# EAGLE board Revision A (EAGLE 6.4)
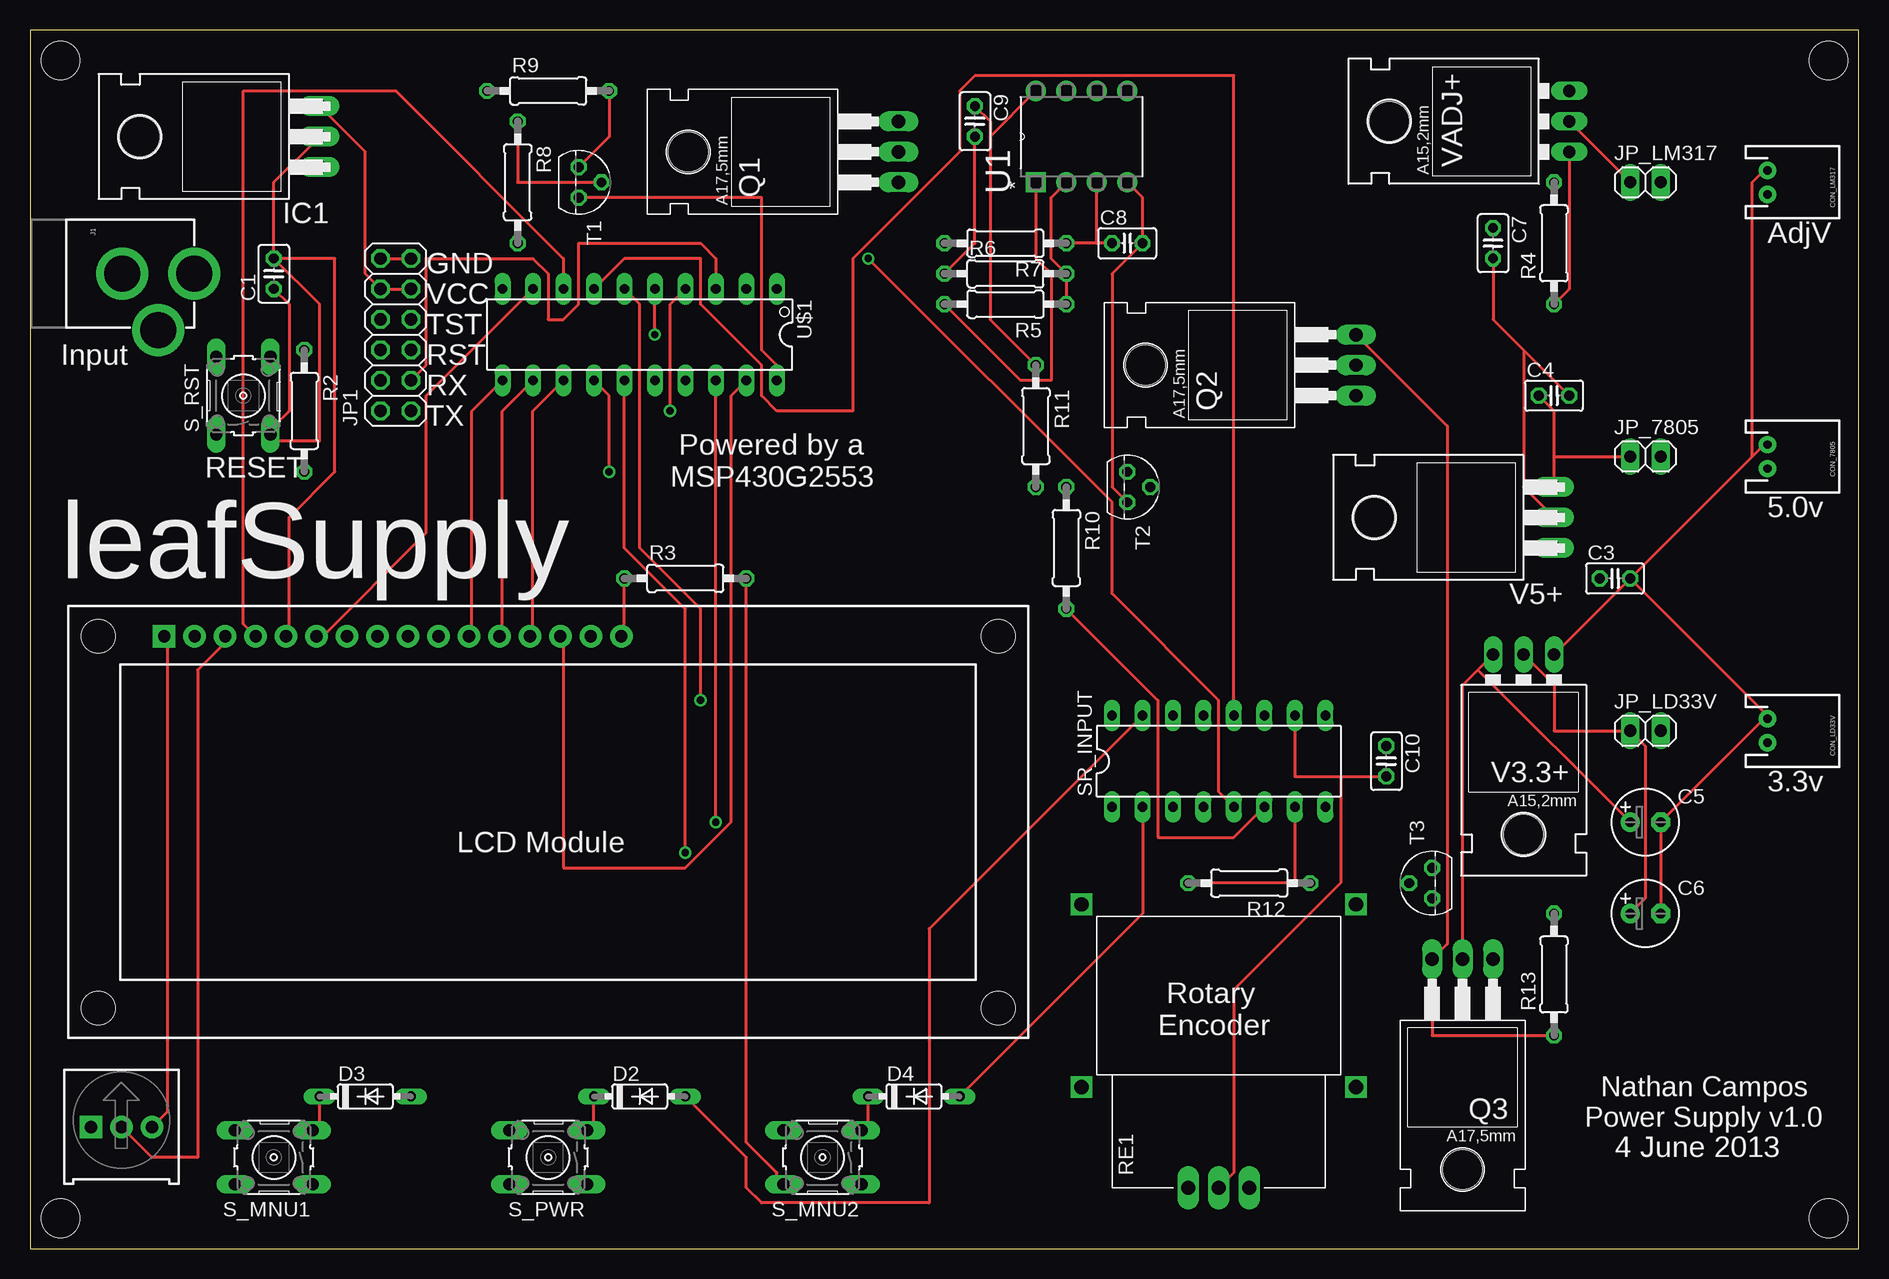
[diagram p0: board, top side]
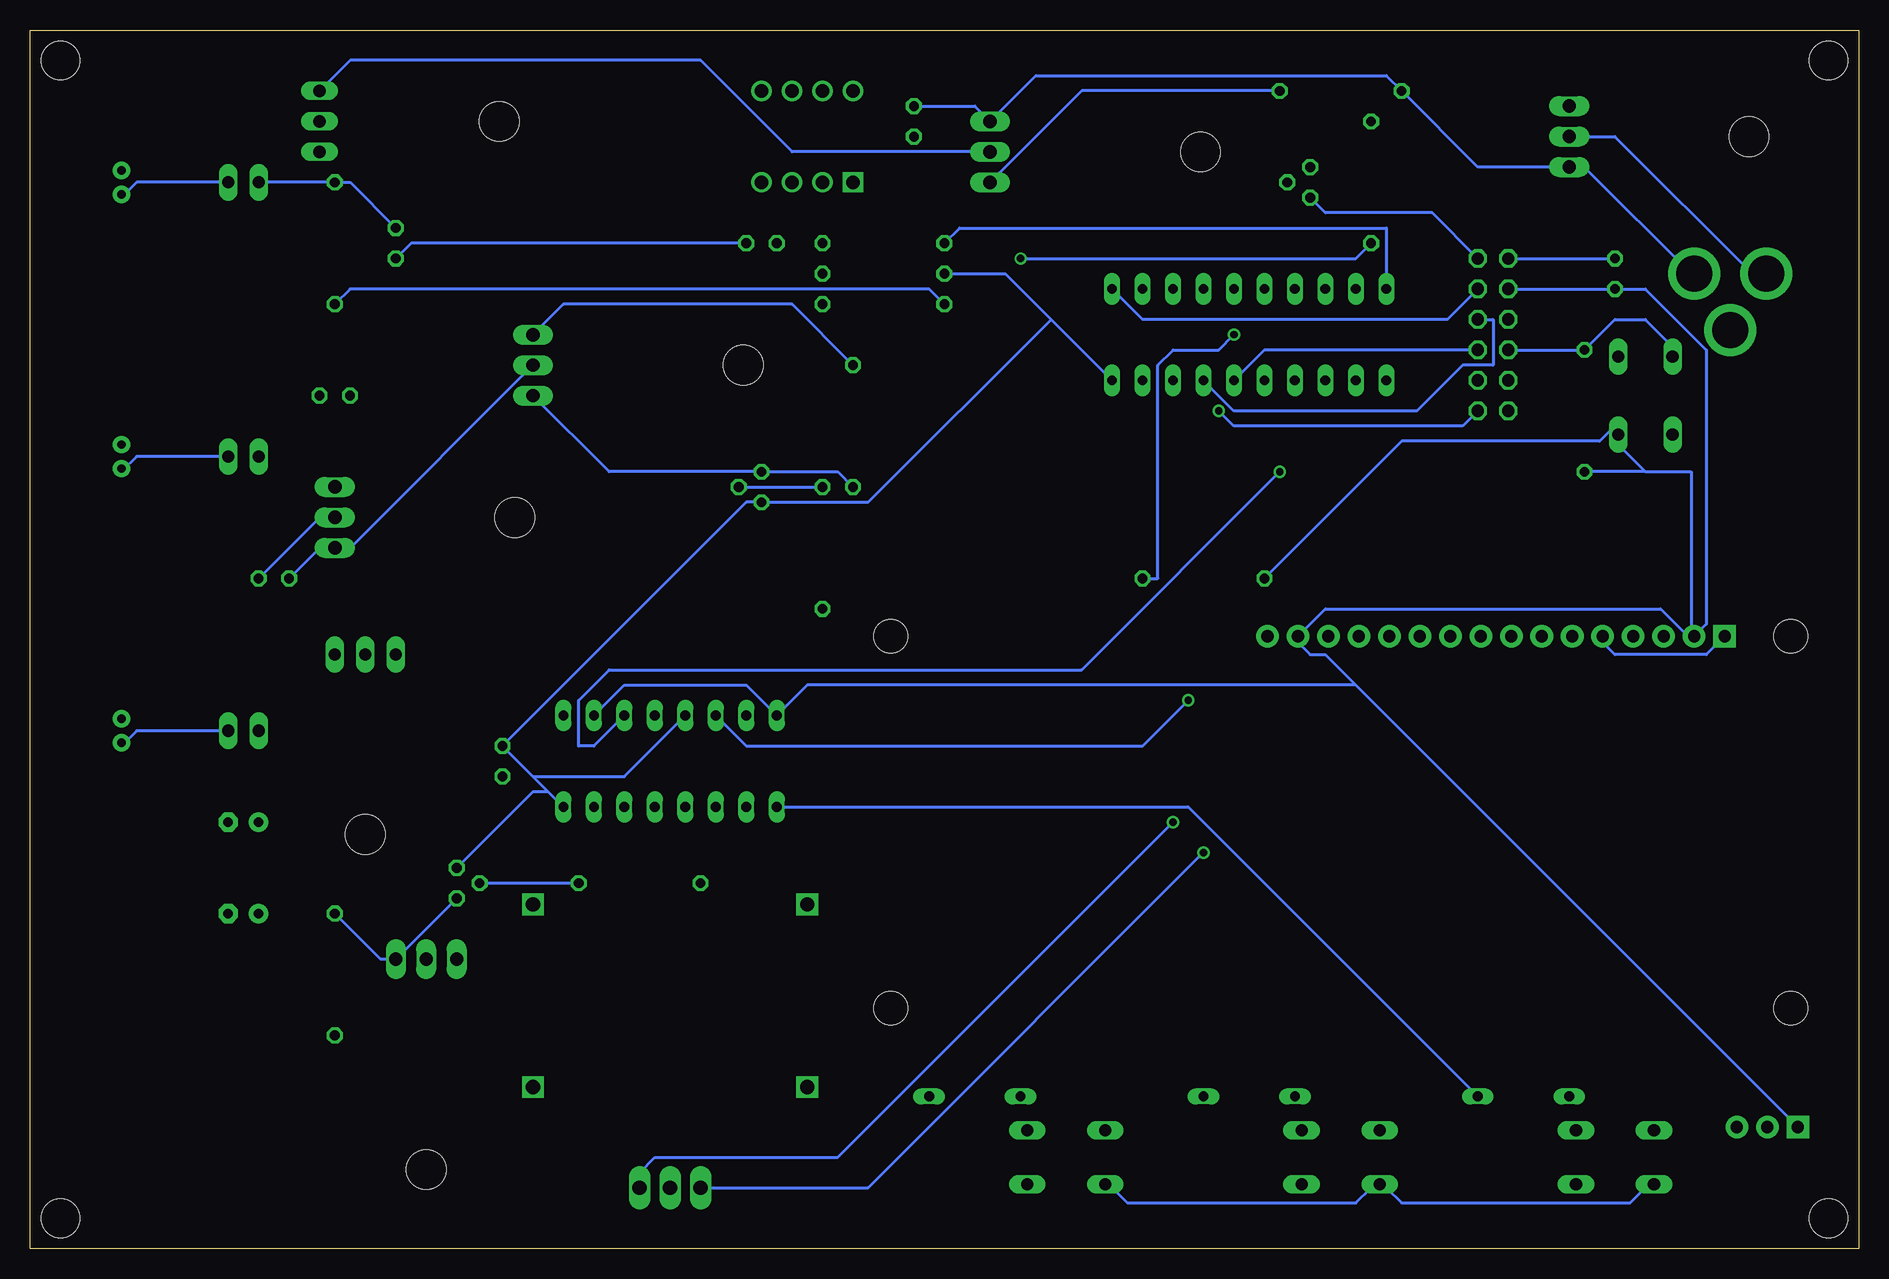
[diagram p1: board, bottom side, seen from below]

Size 152.4 x 101.6 mm. Coordinates in mm from the lower left corner, seen from the top.
Outline: 0,0 152.4,0 152.4,101.6 0,101.6 0,0
Copper layers (1*16): Top 0.035mm / dielectric 1.5mm / Bottom 0.035mm
Design rules "default": minimum track width 10mil, minimum drill 24mil, track to track 8mil, track to pad 8mil, pad to pad 8mil, via to via 8mil, smd to smd 8mil, copper to edge 40mil, drill to drill 8mil, minimum pad ring 10mil, minimum via ring 8mil, stop-mask expansion 4mil, vias tented up to drill 0mil, thermal gap 10mil
Holes 3.2 mm at 2.54,99.06 149.86,99.06 149.86,2.54 2.54,2.54

## Footprints (pad centres in the part's own frame; a part is rotated, then mirrored left to right if it is on the bottom)
C025-025X050 = drill 0.813 octagon: 1 -1.27,0; 2 1.27,0
E2,5-6 = drill 0.813 pad 1.6: + -1.27,0 | drill 0.813 pad 1.6 octagon: - 1.27,0
JST-2-PTH = drill 0.7 pad 1.448: 1 -1,0; 2 1,0
DO35-7 = drill 0.813 long: A 3.81,0; C -3.81,0
TO220H = drill 1.118 long: 1 -2.54,-10.16; 2 0,-10.16; 3 2.54,-10.16 | hole 3.302: 0,4.826
POWER_JACK_PTH = drill 2.997 pad 4.318: GND 0,7.7; GNDBREAK 4.7,10.7; PWR 0,13.7
2X06 = drill 1.016 octagon: 1 -6.35,-1.27; 2 -6.35,1.27; 3 -3.81,-1.27; 4 -3.81,1.27; 5 -1.27,-1.27; 6 -1.27,1.27; 7 1.27,-1.27; 8 1.27,1.27; 9 3.81,-1.27; 10 3.81,1.27; 11 6.35,-1.27; 12 6.35,1.27
1X02 = drill 1.016 long: 1 -1.27,0; 2 1.27,0
TO220 = drill 1.118 long: 1 -2.54,-6.35; 2 0,-6.35; 3 2.54,-6.35 | hole 3.302: 0,11.176
3386U = drill 1.016 pad 1.88 square: 1 -2.54,-0.015 | drill 1.016 pad 1.88: 2 0,-0.015; 3 2.54,-0.015
0207/10 = drill 0.813 octagon: 1 -5.08,0; 2 5.08,0
ECW1J-B = drill 1.2 square: P$4 -11.43,18.542; P$5 11.43,18.542; P$6 -11.43,3.302; P$7 11.43,3.302 | drill 1.2 long: PA -2.54,-5.08; PB 2.54,-5.08; PC 0,-5.08
B3F-10XX = drill 1.016 long: 1 -3.251,2.261; 2 3.251,2.261; 3 -3.251,-2.261; 4 3.251,-2.261
DIL16 = drill 0.813 long: 1 -8.89,-3.81; 2 -6.35,-3.81; 3 -3.81,-3.81; 4 -1.27,-3.81; 5 1.27,-3.81; 6 3.81,-3.81; 7 6.35,-3.81; 8 8.89,-3.81; 9 8.89,3.81; 10 6.35,3.81; 11 3.81,3.81; 12 1.27,3.81; 13 -1.27,3.81; 14 -3.81,3.81; 15 -6.35,3.81; 16 -8.89,3.81
TO92 = drill 0.813 octagon: 1 1.27,0; 2 0,1.905; 3 -1.27,0
DIP254P762X508-8 = drill 1.118 square: 1 -7.62,7.62 | drill 1.118: 2 -7.62,5.08; 3 -7.62,2.54; 4 -7.62,0; 5 0,0; 6 0,2.54; 7 0,5.08; 8 0,7.62
LCD-16X2 = drill 1.016 pad 1.88 square: 1 -32,15.5 | drill 1.016 pad 1.88: 2 -29.46,15.5; 3 -26.92,15.5; 4 -24.38,15.5; 5 -21.84,15.5; 6 -19.3,15.5; 7 -16.76,15.5; 8 -14.22,15.5; 9 -11.68,15.5; 10 -9.14,15.5; 11 -6.6,15.5; 12 -4.06,15.5; 13 -1.52,15.5; 14 1.02,15.5; 15 3.56,15.5; 16 6.1,15.5 | hole 2.8: -37.5,15.5; -37.5,-15.5; 37.5,15.5; 37.5,-15.5
N20 = drill 0.813 long: 1 -11.435,-3.81; 2 -8.895,-3.81; 3 -6.355,-3.81; 4 -3.815,-3.81; 5 -1.275,-3.81; 6 1.265,-3.81; 7 3.805,-3.81; 8 6.345,-3.81; 9 8.885,-3.81; 10 11.425,-3.81; 11 11.425,3.81; 12 8.885,3.81; 13 6.345,3.81; 14 3.805,3.81; 15 1.265,3.81; 16 -1.275,3.81; 17 -3.815,3.81; 18 -6.355,3.81; 19 -8.895,3.81; 20 -11.435,3.81
TO220L1 = drill 1.016 long: 1 -2.54,-3.81; 2 0,-3.81; 3 2.54,-3.81 | hole 3.302: 0,11.176
317TL = drill 1.016 long: 1 -2.54,-3.81; 2 0,-3.81; 3 2.54,-3.81 | hole 3.302: 0,11.176

## Placement (x,y rotation side)
C1  0.1uF  [C025-025X050]  20.32,81.28 90 top
C3  0.47uF  [C025-025X050]  132.08,55.88 0 top
C4  0.1uF  [C025-025X050]  127,71.12 0 top
C5  10uF  [E2,5-6]  134.62,35.56 0 top
C6  10uF  [E2,5-6]  134.62,27.94 0 top
C7  0.1uF  [C025-025X050]  121.92,83.82 270 top
C8  0.1uF  [C025-025X050]  91.44,83.82 0 top
C9  0.1uF  [C025-025X050]  78.74,93.98 270 top
C10  0.1uF  [C025-025X050]  113.03,40.64 270 top
CON_7805  M02JST-PTH-2  [JST-2-PTH]  144.78,66.04 270 top
CON_LD33V  M02JST-PTH-2  [JST-2-PTH]  144.78,43.18 270 top
CON_LM317  M02JST-PTH-2  [JST-2-PTH]  144.78,88.9 270 top
D2  1N4148DO35-7  [DO35-7]  50.8,12.7 0 top
D3  1N4148DO35-7  [DO35-7]  27.94,12.7 0 top
D4  1N4148DO35-7  [DO35-7]  73.66,12.7 0 top
IC1  7805T  [TO220H]  13.97,92.71 90 top
J1  POWER_JACKPTH  [POWER_JACK_PTH]  0,81.28 270 top
JP1  [2X06]  30.48,76.2 90 top
JP_7805  [1X02]  134.62,66.04 0 top
JP_LD33V  [1X02]  134.62,43.18 0 top
JP_LM317  [1X02]  134.62,88.9 0 top
Q1  IRF9530  [TO220]  66.04,91.44 90 top
Q2  IRF9530  [TO220]  104.14,73.66 90 top
Q3  IRF9530  [TO220]  119.38,17.78 180 top
R1  TRIMPOT-PTH-KNOB  [3386U]  7.62,10.16 0 top
R2  10kΩ  [0207/10]  22.86,69.85 270 top
R3  10kΩ  [0207/10]  54.61,55.88 0 top
R4  240Ω  [0207/10]  127,83.82 90 top
R5  100kΩ  [0207/10]  81.28,78.74 180 top
R6  100kΩ  [0207/10]  81.28,81.28 0 top
R7  100kΩ  [0207/10]  81.28,83.82 180 top
R8  10kΩ  [0207/10]  40.64,88.9 270 top
R9  10kΩ  [0207/10]  43.18,96.52 0 top
R10  10kΩ  [0207/10]  86.36,58.42 270 top
R11  10kΩ  [0207/10]  83.82,68.58 270 top
R12  10kΩ  [0207/10]  101.6,30.48 180 top
R13  10kΩ  [0207/10]  127,22.86 90 top
RE1  ECW1J-B24-BCCO24LECW1J-B  [ECW1J-B]  99.06,10.16 0 top
S_MNU1  [B3F-10XX]  20.32,7.62 180 top
S_MNU2  [B3F-10XX]  66.04,7.62 180 top
S_PWR  [B3F-10XX]  43.18,7.62 180 top
S_RST  [B3F-10XX]  17.78,71.12 90 top
SR_INPUT  74HC595N  [DIL16]  99.06,40.64 0 top
T1  BC547  [TO92]  45.72,88.9 270 top
T2  BC547  [TO92]  91.44,63.5 270 top
T3  BC547  [TO92]  116.84,30.48 90 top
U1  TLV2372IP  [DIP254P762X508-8]  91.44,96.52 90 top
U2  LCD-16X2SILK  [LCD-16X2]  43.18,35.56 0 top
U$1  G2XX3---N20  [N20]  50.8,76.2 180 top
V3.3+  LD117AV33  [TO220L1]  124.46,45.72 180 top
V5+  7805T  [TO220H]  116.84,60.96 90 top
VADJ+  [317TL]  124.46,93.98 90 top

## Library data of the parts
C1 C3-C10 = rcl
CON_7805 CON_LD33V CON_LM317 J1 = SparkFun-Connectors
D2-D4 = diode
IC1 V5+ = linear
JP1 JP_7805 JP_LD33V JP_LM317 = pinhead
Q1-Q3 = transistor-fet
R1 = SparkFun-Electromechanical
R2-R13 = resistor
RE1 = Custom Stuff
S_MNU1 S_MNU2 S_PWR S_RST = switch-omron; MPN: B3F-1000; OC_FARNELL: 176432; OC_NEWARK: 36M3542
SR_INPUT = 74xx-eu
T1-T3 = transistor
U1 = Texas Instruments_By_element14_Batch_1; MPN: TLV2372IP; OC_FARNELL: 8455031; OC_NEWARK: 76C7976; PACKAGE: PDIP; SUPPLIER: Texas Instruments
U2 = SparkFun-Displays
U$1 = TI_MSP430_v16
V3.3+ VADJ+ = v-reg

## Nets
7805_IN: C3.1 Q2.2 V5+.1
7805_OUT: C4.1 JP_7805.1 V5+.3
+5V: C1.1 C10.2 IC1.3 JP1.9 JP1.10 R1.1 R2.2 RE1.PC SR_INPUT.10 SR_INPUT.16 U2.2 U2.15 U$1.1
CLOCK: SR_INPUT.11 U$1.14
D4: U2.11 U$1.11
D5: U2.12 U$1.12
D6: U2.13 U$1.13
D7: U2.14 U$1.19
DATA: SR_INPUT.14 U$1.6
ENABLE: U2.6 U$1.9
GND: C1.2 C3.2 C4.2 C5.- C6.- C7.2 C8.2 C9.2 C10.1 CON_7805.1 CON_LD33V.1 CON_LM317.1 IC1.2 J1.GND JP1.11 JP1.12 R1.3 R3.1 R6.1 S_RST.3 SR_INPUT.8 SR_INPUT.13 T1.1 T2.1 T3.1 U1.4 U2.1 U2.5 U2.16 U$1.20 V3.3+.1 V5+.2
INT: R3.2 S_MNU1.2 S_MNU2.2 S_PWR.2 U$1.5
LATCH: SR_INPUT.12 U$1.7
LD33V_IN: C5.+ Q3.2 V3.3+.3
LD33V_OUT: C6.+ JP_LD33V.1 V3.3+.2
LM317_ADJ: R4.1 R5.2 U1.1 VADJ+.1
LM317_IN: Q1.2 VADJ+.3
LM317_OUT: C7.1 JP_LM317.1 R4.2 VADJ+.2
N$1: R1.2 U2.3
N$2: D2.C S_PWR.3
N$3: JP1.6 R2.1 S_RST.2
N$4: D3.C S_MNU1.3
N$5: D4.C S_MNU2.3
N$6: R5.1 R6.2 U1.2
N$7: C8.1 R7.1 U1.3
N$8: R8.1 T1.2
N$9: Q1.1 R9.2 T1.3
N$10: R10.1 T2.2
N$11: D3.A SR_INPUT.1
N$12: Q2.1 R11.2 T2.3
N$13: R12.1 T3.2
N$14: Q3.1 R13.2 T3.3
N$15: CON_LM317.2 JP_LM317.2
N$16: D4.A SR_INPUT.2
N$17: D2.A SR_INPUT.15
N$18: CON_7805.2 JP_7805.2
N$19: CON_LD33V.2 JP_LD33V.2
PWM: R7.2 U$1.10
RE_A: RE1.PA U$1.15
RE_B: RE1.PB U$1.18
RS: U2.4 U$1.8
RST: JP1.5 U$1.16
RX: JP1.3 U$1.3
T_3V3: R12.2 SR_INPUT.7
T_5V: R10.2 SR_INPUT.6
T_ADJV: R8.2 SR_INPUT.5
TEST: JP1.7 U$1.17
TX: JP1.1 U$1.4
VIN: C9.1 IC1.1 J1.PWR Q1.3 Q2.3 Q3.3 R9.1 R11.1 R13.1 U1.8

## Tracks (layer width: path | path; a pad name or v marks a point on that pad's centre or on a via)
7805_IN
  Bottom 0.254: C3.1 128.27,58.42 V5+.1 125.73,58.42 Q2.2
7805_OUT
  Top 0.254: C4.1 127,69.85 127,66.04 | V5+.3 127,66.04 | 127,66.04 JP_7805.1
+5V
  Top 0.254: 20.32,68.58 21.59,69.85 21.59,78.74 C1.1 | IC1.3 27.94,91.44 27.94,81.28 JP1.10 JP1.9 | 109.22,39.37 105.41,39.37 SR_INPUT.10 | 109.22,39.37 C10.2 | RE1.PC 100.33,6.35 100.33,21.59 109.22,30.48 109.22,39.37
  Bottom 0.254: JP1.9 34.29,77.47 59.69,77.47 U$1.1 | JP1.10 C1.1 17.78,80.01 12.7,74.93 12.7,52.07 13.97,50.8 | 13.97,50.8 13.97,64.77 17.78,64.77 | 20.32,67.31 17.78,64.77 | SR_INPUT.10 102.87,46.99 92.71,46.99 SR_INPUT.16 87.63,46.99 41.91,46.99 | 41.91,46.99 44.45,49.53 45.72,49.53 46.99,50.8 | 41.91,46.99 5.08,10.16 R1.1 | 13.97,50.8 16.51,53.34 44.45,53.34 46.99,50.8 | 46.99,50.8 U2.15 | 17.78,64.77 R2.2 | 13.97,50.8 U2.2
CLOCK  (via drill 0.61)
  Top 0.254: v48.26,64.77 48.26,71.12 U$1.14
  Bottom 0.254: v48.26,64.77 64.77,48.26 104.14,48.26 106.68,45.72 106.68,41.91 105.41,41.91 SR_INPUT.11
D4
  Top 0.254: U$1.11 36.83,69.85 36.83,50.8 U2.11
D5
  Top 0.254: U$1.12 39.37,69.85 39.37,50.8 U2.12
D6
  Top 0.254: U$1.13 41.91,69.85 41.91,50.8 U2.13
D7
  Top 0.254: U$1.19 58.42,71.12 58.42,35.56 54.61,31.75 44.45,31.75 44.45,50.8 U2.14
DATA  (via drill 0.61)
  Top 0.254: v55.88,45.72 55.88,53.34 50.8,58.42 50.8,78.74 U$1.6
  Bottom 0.254: v55.88,45.72 59.69,41.91 92.71,41.91 SR_INPUT.14
ENABLE
  Top 0.254: U$1.9 33.02,71.12 33.02,59.69 24.13,50.8 U2.6
GND
  Top 0.254: IC1.2 20.32,88.9 C1.2 | JP1.12 JP1.11 | R3.1 49.53,50.8 U2.16 | U2.5 21.59,50.8 21.59,60.96 25.4,64.77 25.4,82.55 C1.2 | R1.3 10.16,10.16 11.43,11.43 11.43,50.8 U2.1 | C1.2 24.13,78.74 24.13,67.31 20.32,67.31 S_RST.3 | 144.78,44.45 C5.- C6.- | C3.2 143.51,66.04 | 143.51,66.04 144.78,67.31 CON_7805.1 | 143.51,66.04 143.51,88.9 144.78,90.17 CON_LM317.1 | C3.2 V3.3+.1 | C3.2 144.78,44.45 | 144.78,44.45 CON_LD33V.1 | C9.2 78.74,83.82 R6.1 | T2.1 90.17,63.5 90.17,81.28 C8.2 92.71,87.63 U1.4 | 124.46,74.93 121.92,77.47 C7.2 | 124.46,74.93 C4.2 | V5+.2 124.46,63.5 124.46,74.93 | T1.1 60.96,87.63 60.96,74.93 62.23,73.66 U$1.20
  Bottom 0.254: T1.1 44.45,86.36 35.56,86.36 JP1.11 | JP1.12 C1.2 | IC1.2 20.32,92.71 8.89,81.28 J1.GND | R3.1 38.1,67.31 21.59,67.31 20.32,68.58 S_RST.3 | U2.5 21.59,50.8 20.32,49.53 12.7,49.53 11.43,50.8 U2.1 | C3.2 128.27,60.96 V5+.2 | 67.31,77.47 71.12,81.28 R6.1 | 67.31,77.47 U$1.20 | 110.49,39.37 C10.1 92.71,62.23 T2.1 82.55,62.23 67.31,77.47 | 110.49,39.37 109.22,38.1 | 109.22,38.1 SR_INPUT.8 | SR_INPUT.13 102.87,39.37 110.49,39.37 | T3.1 110.49,38.1 109.22,38.1 | C7.2 120.65,83.82 C8.2
INT  (via drill 0.61)
  Top 0.254: R3.2 59.69,8.89 62.23,6.35 62.23,5.08 S_MNU2.2 | v52.07,76.2 U$1.5
  Bottom 0.254: S_MNU1.2 17.78,5.08 19.05,3.81 38.1,3.81 39.37,5.08 S_PWR.2 40.64,5.08 41.91,3.81 60.96,3.81 62.23,5.08 S_MNU2.2 | v52.07,76.2 53.34,74.93 57.15,74.93 58.42,73.66 58.42,55.88 R3.2
LATCH
  Top 0.254: SR_INPUT.12 100.33,97.79 78.74,97.79 77.47,96.52 77.47,91.44 68.58,82.55 68.58,69.85 62.23,69.85 60.96,71.12 60.96,73.66 55.88,78.74 55.88,82.55 49.53,82.55 U$1.7
LD33V_IN
  Top 0.254: 120.65,48.26 119.38,46.99 Q3.2 | 120.65,48.26 V3.3+.3 | 120.65,48.26 C5.+
LD33V_OUT
  Top 0.254: V3.3+.2 127,46.99 127,43.18 JP_LD33V.1 134.62,41.91 134.62,29.21 C6.+
LM317_ADJ
  Top 0.254: R4.1 128.27,80.01 VADJ+.1 | R5.2 82.55,72.39 85.09,72.39 85.09,81.28 83.82,82.55 U1.1
  Bottom 0.254: R4.1 125.73,80.01 77.47,80.01 R5.2
LM317_IN
  Bottom 0.254: VADJ+.3 125.73,99.06 96.52,99.06 88.9,91.44 Q1.2
LM317_OUT
  Top 0.254: JP_LM317.1 VADJ+.2
  Bottom 0.254: C7.1 125.73,88.9 R4.2 JP_LM317.1
N$1
  Top 0.254: R1.2 7.62,10.16 10.16,7.62 13.97,7.62 13.97,48.26 16.51,50.8 U2.3
N$2
  Top 0.254: D2.C 46.99,10.16 S_PWR.3
N$3
  Bottom 0.254: JP1.6 R2.1 20.32,77.47 17.78,77.47 15.24,74.93 S_RST.2
N$4
  Top 0.254: D3.C 24.13,10.16 S_MNU1.3
N$5
  Top 0.254: D4.C 69.85,10.16 S_MNU2.3
N$6
  Top 0.254: R5.1 R6.2 85.09,82.55 85.09,87.63 U1.2
N$7
  Top 0.254: C8.1 88.9,83.82 | 88.9,83.82 R7.1 | 88.9,83.82 U1.3
N$8
  Top 0.254: T1.2 40.64,88.9 R8.1
N$9
  Top 0.254: T1.3 48.26,92.71 R9.2
  Bottom 0.254: Q1.1 64.77,96.52 R9.2
N$10
  Bottom 0.254: T2.2 R10.1
N$11
  Bottom 0.254: D3.A 55.88,36.83 SR_INPUT.1
N$12
  Bottom 0.254: R11.2 85.09,64.77 T2.3 104.14,64.77 Q2.1
N$13
  Bottom 0.254: T3.2 R12.1
N$14
  Bottom 0.254: T3.3 Q3.1 123.19,24.13 R13.2
N$15
  Bottom 0.254: JP_LM317.2 143.51,88.9 144.78,87.63 CON_LM317.2
N$16
  Top 0.254: D4.A 92.71,27.94 SR_INPUT.2
N$17
  Top 0.254: D2.A 59.69,7.62 59.69,5.08 60.96,3.81 74.93,3.81 74.93,26.67 SR_INPUT.15
N$18
  Bottom 0.254: JP_7805.2 143.51,66.04 144.78,64.77 CON_7805.2
N$19
  Bottom 0.254: JP_LD33V.2 143.51,43.18 144.78,41.91 CON_LD33V.2
PWM
  Bottom 0.254: R7.2 74.93,85.09 39.37,85.09 U$1.10
RE_A  (via drill 0.61)
  Top 0.254: v54.61,33.02 54.61,53.34 49.53,58.42 U$1.15
  Bottom 0.254: v54.61,33.02 82.55,5.08 RE1.PA
RE_B  (via drill 0.61)
  Top 0.254: v57.15,35.56 U$1.18
  Bottom 0.254: v57.15,35.56 85.09,7.62 100.33,7.62 101.6,6.35 RE1.PB
RS
  Top 0.254: U$1.8 44.45,82.55 30.48,96.52 17.78,96.52 17.78,52.07 19.05,50.8 U2.4
RST
  Bottom 0.254: JP1.5 49.53,74.93 U$1.16
RX
  Top 0.254: JP1.3 33.02,73.66 33.02,82.55 41.91,82.55 43.18,81.28 43.18,77.47 44.45,77.47 45.72,78.74 45.72,83.82 55.88,83.82 57.15,82.55 U$1.3
T_3V3
  Top 0.254: R12.2 105.41,30.48 SR_INPUT.7
T_5V
  Top 0.254: SR_INPUT.6 100.33,34.29 93.98,34.29 93.98,45.72 R10.2
T_ADJV  (via drill 0.61)
  Top 0.254: v69.85,82.55 90.17,62.23 90.17,54.61 99.06,45.72 99.06,38.1 SR_INPUT.5
  Bottom 0.254: R8.2 41.91,82.55 v69.85,82.55
TEST
  Bottom 0.254: JP1.7 30.48,77.47 30.48,73.66 33.02,73.66 36.83,69.85 52.07,69.85 U$1.17
TX  (via drill 0.61)
  Top 0.254: v53.34,69.85 53.34,78.74 U$1.4
  Bottom 0.254: v53.34,69.85 52.07,68.58 33.02,68.58 JP1.1
VIN
  Top 0.254: R13.1 116.84,17.78 Q3.3 118.11,25.4 118.11,68.58 Q2.3 | R11.1 80.01,77.47 80.01,92.71 | 80.01,92.71 80.01,93.98 C9.1 | 80.01,92.71 U1.8
  Bottom 0.254: J1.PWR 13.97,81.28 22.86,90.17 IC1.1 31.75,90.17 R9.1 39.37,97.79 68.58,97.79 Q1.3 73.66,95.25 C9.1 | Q2.3 107.95,78.74 88.9,78.74 R11.1

## Text on the board
tPlace: AdjV | GND | VCC | TST | Input | RST | RX | TX | RESET | Powered by a / MSP430G2553 | 5.0v | leafSupply | 3.3v | LCD Module | Rotary / Encoder | Nathan Campos | Power Supply v1.0 | 4 June 2013